# Altium PCB PCB_Switch_PowerDetect.PcbDoc
Units mm, origin at the board's own origin, x right, y up, seen from the top; angles counter-clockwise.
Board outline 30 x 30 mm, 2 copper layers (Top Layer, Bottom Layer), stack 0.579 mm thick; 36 components, 22 nets, 108 pads, 42 vias.
Unrouted connection lines stored in the file: 22.
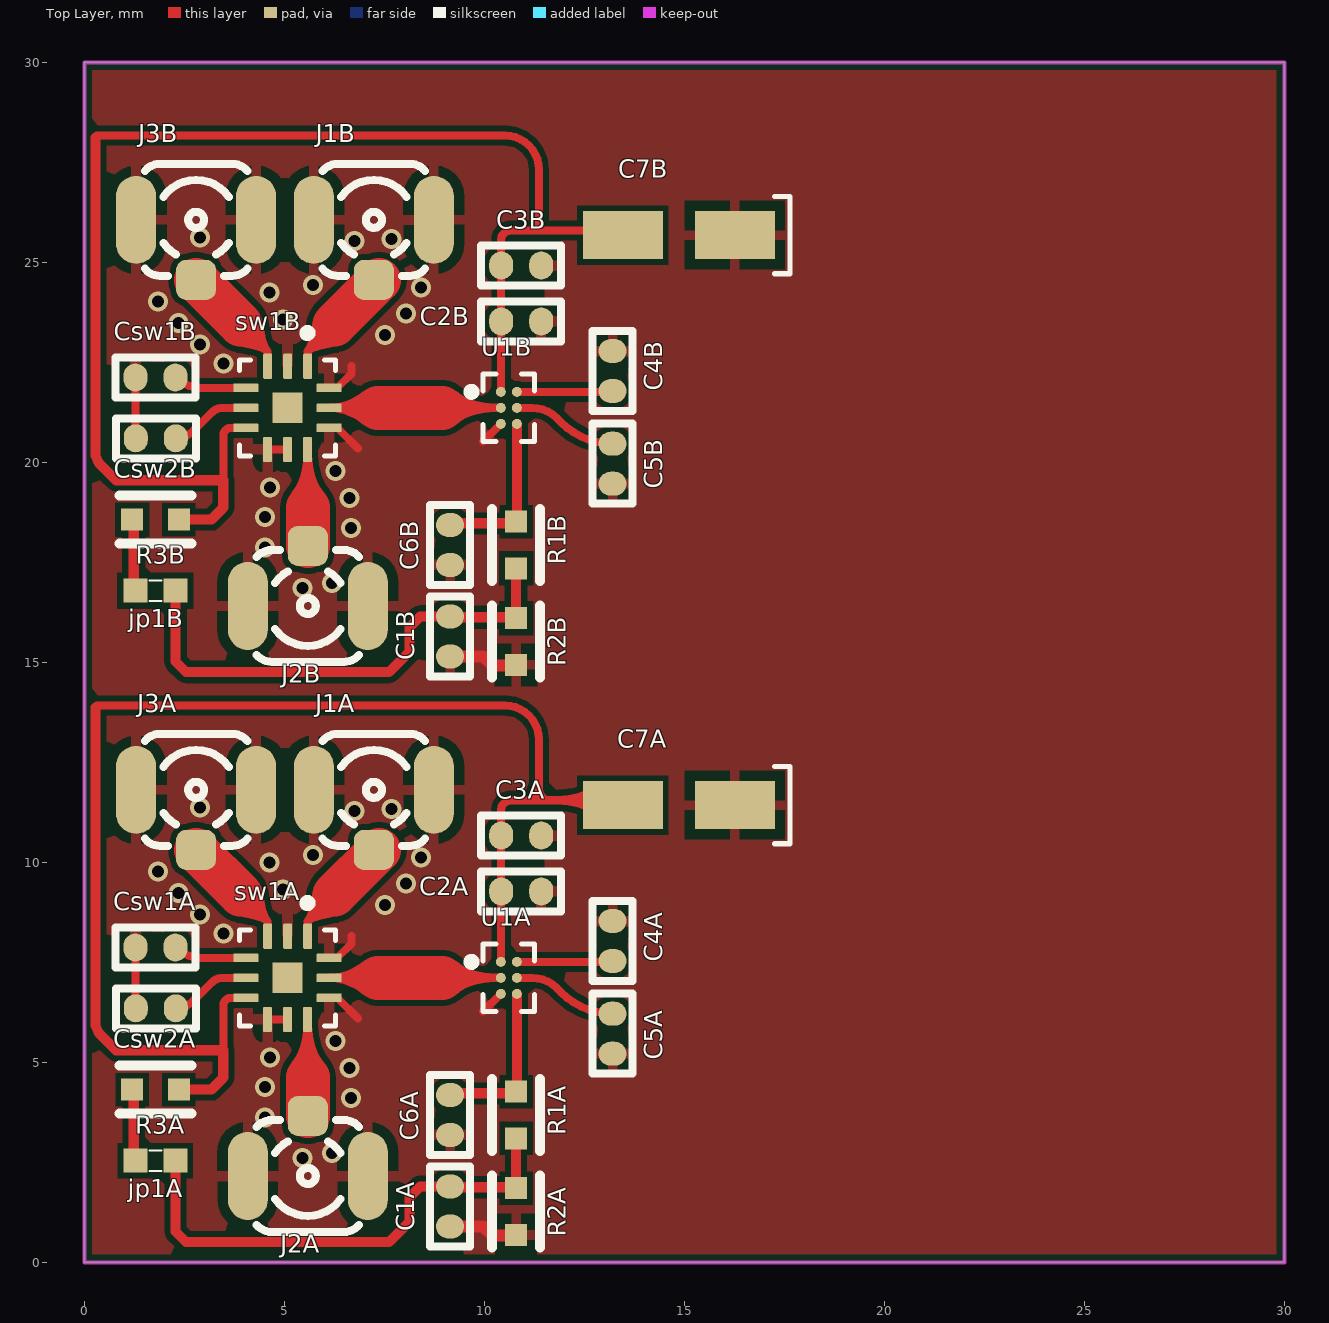
[diagram p0: Top Layer view]
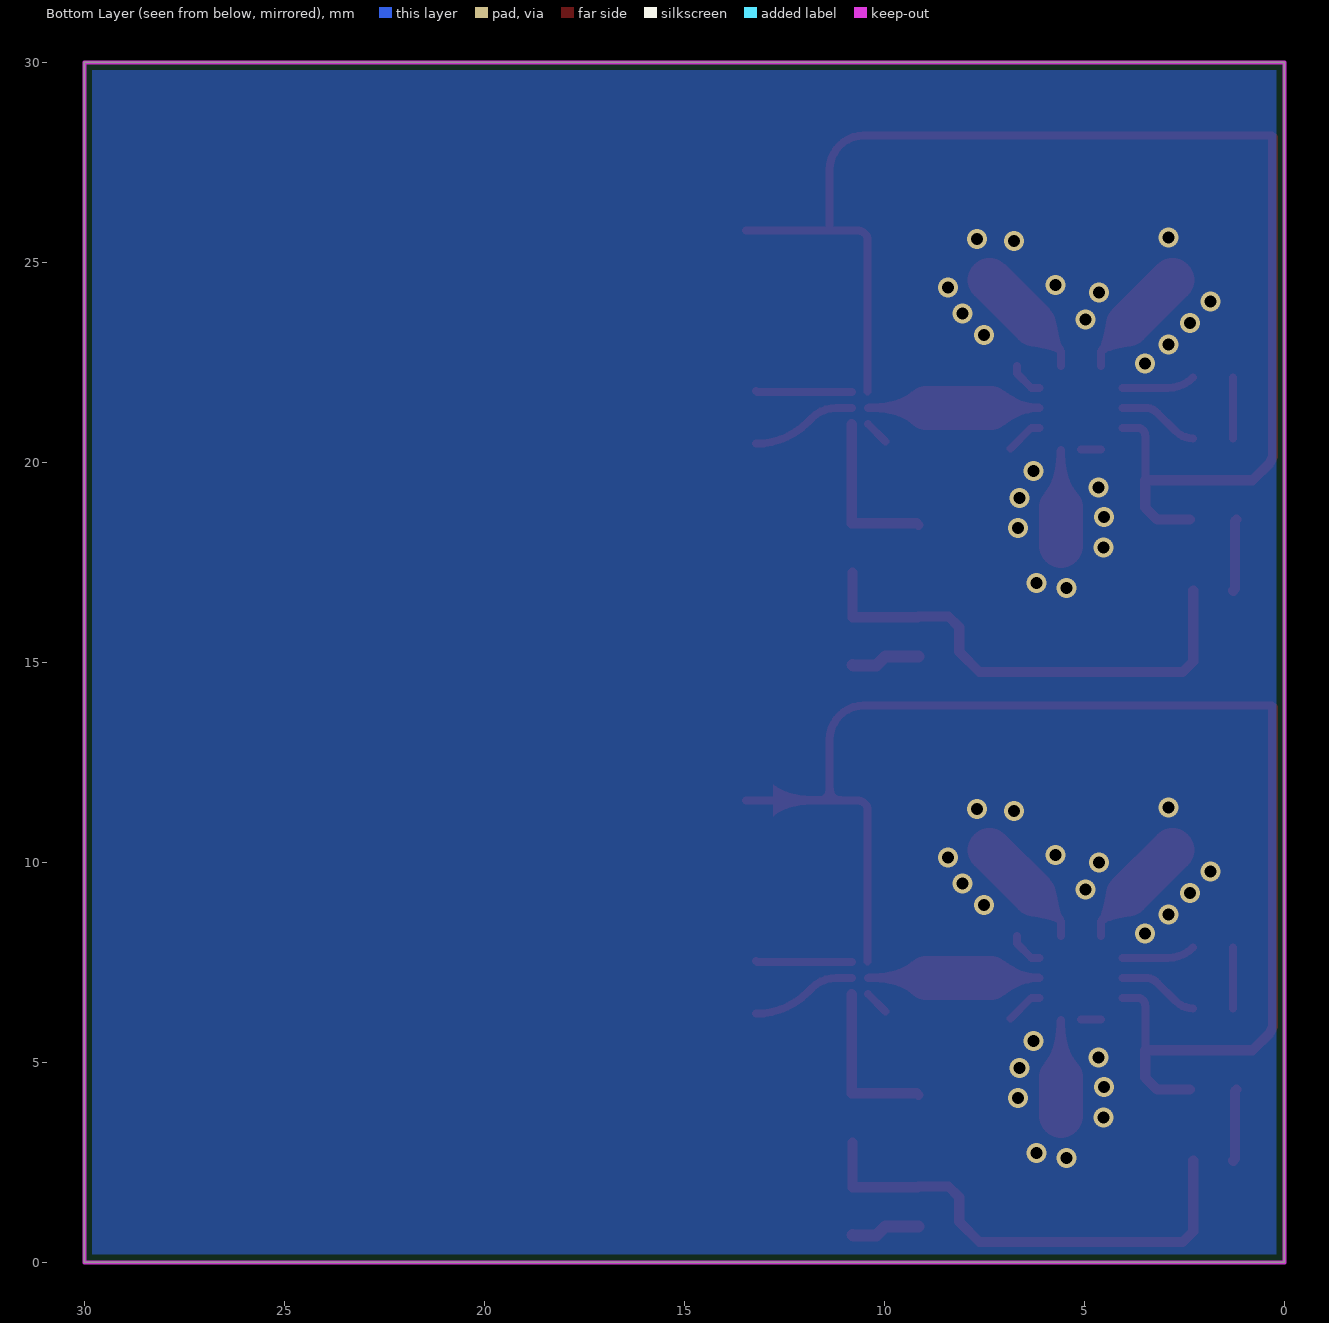
[diagram p1: Bottom Layer view, seen from below]
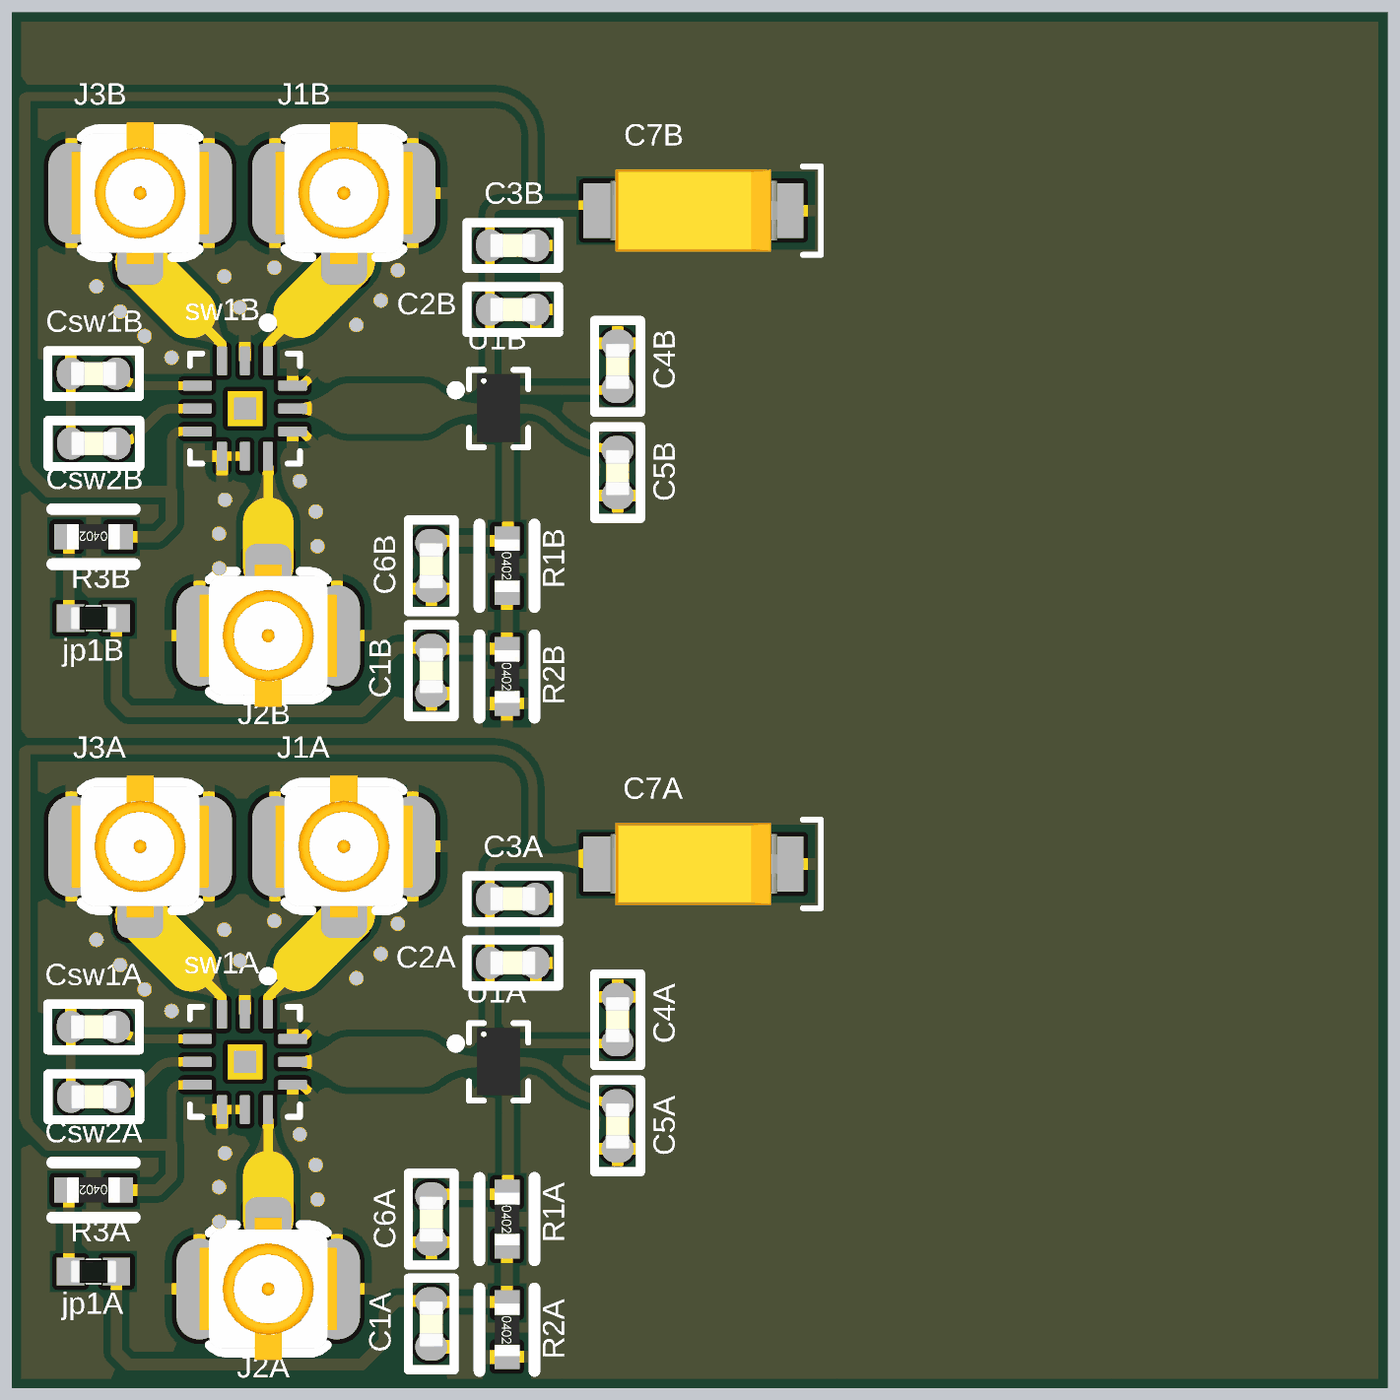
[diagram p2: 3D render of the assembled board from above, using the file's embedded part models]

## Layer stack, top to bottom
Top Solder: solder mask 0.0102, Solder Resist, Dk 3.5
Top Layer: signal copper 0.0356
Dielectric 1: prepreg 0.508, RO4350B_Equivalent, Dk 3.48
Bottom Layer: signal copper 0.0356
Bottom Solder: solder mask 0.0102, Solder Resist, Dk 3.5

## Board outline
0,0 30,0 30,30 0,30

## Design rules (kind name [scope] priority, off if disabled: settings)
Clearance Clearance_LMH2110 [InComponent('U1A')] p1: gap=0.1 ignorepadtopadclearanceinfootprint=TRUE
Clearance [All] p2: gap=0.15 ignorepadtopadclearanceinfootprint=TRUE
PolygonConnect PolygonConnect_vias [IsVia] p1: connectstyle=Direct reliefconductorwidth=0.254 reliefentries=4 polygonreliefangle="90 Angle" airgapwidth=0.254
PolygonConnect [All] p2: connectstyle=Relief reliefconductorwidth=0.254 reliefentries=4 polygonreliefangle="90 Angle" airgapwidth=0.254
RoutingVias [All] p1: holewidth=0.711 width=1.27 viastyle="Through Hole" minholewidth=0.711 minwidth=1.27 maxholewidth=0.711 maxwidth=1.27
SolderMaskExpansion [All] p1: expansion=0.102 istentingtop=FALSE
SupplyNets "Schematic Supply Nets" [InNet('GND')] p1: voltage=0.000
Width Width_RF [InNetClass('RF')] p1: maxlimit=1.1 minlimit=0.2 preferedwidth=0.254
Width [All] p2: maxlimit=0.3 minlimit=0.2 preferedwidth=0.254
30 further rules are at their usual default settings.

## Components (designator, comment, footprint, x,y, rotation, side; value= is the part's Value field where it differs from the comment)
C1A "Capacitor C SMD 0402" C0402 9.144,1.397 r90 top value=10pF
C1B "Capacitor C SMD 0402" C0402 9.144,15.647 r90 top value=10pF
C2A "Capacitor C SMD 0402" C0402 10.922,9.271 r0 top value=0.01uF
C2B "Capacitor C SMD 0402" C0402 10.922,23.521 r0 top value=0.01uF
C3A "Capacitor C SMD 0402" C0402 10.922,10.668 r0 top value=10pF
C3B "Capacitor C SMD 0402" C0402 10.922,24.918 r0 top value=10pF
C4A "Capacitor C SMD 0402" C0402 13.208,8.033 r270 top value=10pF
C4B "Capacitor C SMD 0402" C0402 13.208,22.283 r270 top value=10pF
C5A "Capacitor C SMD 0402" C0402 13.208,5.715 r90 top value=1pF
C5B "Capacitor C SMD 0402" C0402 13.208,19.965 r90 top value=1pF
C6A "Capacitor C SMD 0402" C0402 9.144,3.683 r90 top value=10pF
C6B "Capacitor C SMD 0402" C0402 9.144,17.933 r90 top value=10pF
C7A "Capacitor Tantalum SMD" "CAPP 1206 (3216X18L) Size A" 16.262,11.43 r180 top value=10uf
C7B "Capacitor Tantalum SMD" "CAPP 1206 (3216X18L) Size A" 16.262,25.68 r180 top value=10uf
Csw1A "Capacitor C SMD 0402" C0402 1.778,7.874 r0 top value=100pF
Csw1B "Capacitor C SMD 0402" C0402 1.778,22.124 r0 top value=100pF
Csw2A "Capacitor C SMD 0402" C0402 1.786,6.35 r0 top value=100pF
Csw2B "Capacitor C SMD 0402" C0402 1.786,20.6 r0 top value=100pF
J1A "UFL" UFL 7.239,11.811 r0 top
J1B "UFL" UFL 7.239,26.061 r0 top
J2A "UFL" UFL 5.588,2.159 r180 top
J2B "UFL" UFL 5.588,16.409 r180 top
J3A "UFL" UFL 2.794,11.811 r0 top
J3B "UFL" UFL 2.794,26.061 r0 top
jp1A "jumper" "RES 0402 (1005X04L)" 1.778,2.54 r0 top
jp1B "jumper" "RES 0402 (1005X04L)" 1.778,16.79 r0 top
R1A "Resistor SMD 0402" SMD-0402-RES 10.795,3.683 r180 top value=1K
R1B "Resistor SMD 0402" SMD-0402-RES 10.795,17.933 r180 top value=1K
R2A "Resistor SMD 0402" SMD-0402-RES 10.795,1.27 r180 top value=1K
R2B "Resistor SMD 0402" SMD-0402-RES 10.795,15.52 r180 top value=1K
R3A "Resistor SMD 0402" SMD-0402-RES 1.778,4.318 r90 top value=100K
R3B "Resistor SMD 0402" SMD-0402-RES 1.778,18.568 r90 top value=100K
sw1A "sky13373-460lf" QFN50P200X200X65-13N 5.08,7.112 r270 top
sw1B "sky13373-460lf" QFN50P200X200X65-13N 5.08,21.362 r270 top
U1A "LMH2110" BGA6N40P3X2_124X84X67N 10.614,7.112 r0 top
U1B "LMH2110" BGA6N40P3X2_124X84X67N 10.614,21.362 r0 top

## Footprints (in the part's own frame and the unit in brackets; to place one, negate y for a bottom-side part, rotate by r counter-clockwise, add the part's x,y. Pads: shape width x height; smd on the part's side, far side on the other; paste and mask are expansions set on the pad)
BGA6N40P3X2_124X84X67N [mm]
  round 0.25 smd: A1(-0.2,0.4) A2(0.2,0.4) B1(-0.2,0) B2(0.2,0) C1(-0.2,-0.4) C2(0.2,-0.4)
  silkscreen extent -1.03,-0.84 0.64,0.84, body extent -0.48,-0.74 0.48,0.75, height 0.51
C0402 [mm] "CHIP Capacitor, 1.0X0.5mm, 0402"
  oval 0.6x0.7 smd mask+0.075: 1(-0.5,0) 2(0.5,0)
  silkscreen extent -1,-0.5 1,0.5, body extent -0.5,-0.26 0.5,0.27, height 0.36
"CAPP 1206 (3216X18L) Size A" [mm] "Chip Capacitor, 2-Leads, Body 3.2x1.6mm, IPC High Density, chip Tantalum"
  rect 1.999x1.199 smd: 1(0,0) 2(2.8,0)
  silkscreen extent -1.38,-0.97 -0.99,0.97, body extent -0.43,-0.9 3.21,0.9, height 1.8
QFN50P200X200X65-13N [mm]
  rrect25% 0.63x0.22 smd: 1(-1.04,0.5) 3(-1.04,-0.5) 9(1.04,0.5) GND(-1.04,0) GND(1.04,0) GND(1.04,-0.5)
  rrect25% 0.22x0.63 smd: 4(-0.5,-1.04) 5(0,-1.04) 6(0.5,-1.04) 11(0,1.04) GND(-0.5,1.04) GND(0.5,1.04)
  rect 0.76x0.76 smd paste-0.14: 13(0,0)
  silkscreen extent -1.97,-1.2 1.2,1.2, body extent -1.35,-1.36 1.35,1.36, height 0.56
"RES 0402 (1005X04L)" [mm] "Chip Resistor, 2-Leads, Body 1.0x0.5mm, IPC High Density _ (0.031/0.063 W)"
  rect 0.6x0.6 smd: 1(-0.5,0) 2(0.5,0)
  silkscreen extent -0.15,-0.25 0.15,0.25, body extent -0.51,-0.25 0.51,0.25, height 0.35
SMD-0402-RES [mm]
  rect 0.55x0.55 smd: 1(0,0.584) 2(0,-0.584)
  silkscreen extent -0.6,-0.9 0.6,0.9, body extent -0.28,-0.57 0.27,0.58, height 0.41
UFL [mm] "CONN RF, COAX UP, U.FL-R-SMT-1 2.8x2.8mm"
  rrect50% 1x1 smd: 1(0,-1.5)
  oval 1x2.2 smd: 2(-1.5,0) 3(1.5,0)
  silkscreen extent -1.28,-1.4 1.28,1.4, body extent -1.5,-1.55 1.5,1.55, height 1.25

## Part data
J1A J1B J2A J2B J3A J3B: library part "RF UFL", "CONN, RF, U.FL, STRAIGHT, Ultra Miniature Coaxial", ComponentLink1Description="Our Website:", ComponentLink1URL=https://www.spaceomid.com/, Designed by=MJKhodami
sw1A sw1B: "Broadband frequency range: 0.1 to 8.0 GHz / • Low insertion loss: 0.45 dB @ 2.5 GHz, 0.65 dB @ 7.125 GHz / • High isolation: 30 dB up to 2.5 GHz / • No external DC blocking capacitors required / • Positive low voltage control: VCTL = 1.65 to 3.00 V, / VDD = 2.5 to 4.8 V / • Small, QFN (12-pin, 2 x 2 mm) package / (MSL1, 260 °C per JEDEC J-STD-020)"
U1A U1B: "- Wide Supply Range from 2.7 V to 5 V / - Logarithmic Root Mean Square Response"
C1A C1B C2A C2B C3A C3B C4A C4B C5A C5B C6A C6B C7A C7B Csw1A Csw1B Csw2A Csw2B R1A R1B R2A R2B R3A R3B: Designed by=MJKhodami

## Via types
v1: diameter 0.5, hole 0.3, Top Layer to Bottom Layer, tented both sides, 42 vias

## Nets (pads, with @x,y where several pads share a name; then routed paths per layer and width w, separated by ;. In a path a pad name is that pad's centre, name@x,y a point inside that pad or via, vN(x,y) a via of type N, cw(c..) or ccw(c..) an arc to the next point about the centre after c; other vN are vias at no path point)
GND: C1A.1 C1B.1 C2A.2 C2B.2 C3A.2 C3B.2 C4A.1 C4B.1 C5A.1 C5B.1 C6A.1 C6B.1 C7A.1 C7B.1 Csw1A.1 Csw1B.1 Csw2A.1 Csw2B.1 J1A.2 J1A.3 J1B.2 J1B.3 J2A.2 J2A.3 J2B.2 J2B.3 J3A.2 J3A.3 J3B.2 J3B.3 R2A.1 R2B.1 sw1A.GND sw1B.GND U1A.C1 U1B.C1 | length 12.5
  Top Layer w0.2: Csw1A.1 1.282,7.87 1.282,6.354 Csw2A.1 ; Csw1B.1 1.282,22.12 1.282,20.604 Csw2B.1 ; sw1A.GND@4.58,6.072 sw1A.GND@5.08,6.072 ; sw1B.GND@4.58,20.322 sw1B.GND@5.08,20.322 ; sw1A.GND@6.12,6.612 6.325,6.612 6.841,6.096 ; sw1A.GND@6.12,7.612 6.325,7.612 6.685,7.972 6.685,8.154 ; sw1B.GND@6.12,20.862 6.325,20.862 6.841,20.346 ; sw1B.GND@6.12,21.862 6.325,21.862 6.685,22.222 6.685,22.404 ; 9.969,6.267 U1A.C1 ; 9.969,20.517 U1B.C1
  Top Layer w0.3: C1A.1 9.972,0.897 10.195,0.674 10.784,0.674 R2A.1 ; C1B.1 9.972,15.147 10.195,14.924 10.784,14.924 R2B.1
  other v1: 5.449,2.602 6.191,2.734 4.52,3.627 6.663,4.111 4.513,4.38 6.625,4.864 4.643,5.123 6.274,5.532 3.48,8.223 2.891,8.694 7.511,8.936 2.358,9.227 4.967,9.32 8.044,9.469 1.841,9.776 4.63,9.995 8.414,10.126 5.721,10.186 6.754,11.285 7.681,11.333 2.894,11.376 5.449,16.852 6.191,16.984 4.52,17.877 6.663,18.361 4.513,18.631 6.625,19.114 4.643,19.373 6.274,19.782 3.48,22.473 2.891,22.944 7.511,23.186 2.358,23.477 4.967,23.57 8.044,23.719 1.841,24.026 4.63,24.245 8.414,24.377 5.721,24.436 6.754,25.535 7.681,25.583 2.894,25.626
NetC1A_2: C1A.2 jp1A.2 R1A.1 R2A.2 | length 12.5
  Top Layer w0.254: jp1A.2 2.278,0.77 2.54,0.508 7.62,0.508 8.128,1.016 8.128,1.629 8.396,1.897 C1A.2 9.165,1.876 10.795,1.876 R1A.1@10.795,2.997
NetC1B_2: C1B.2 jp1B.2 R1B.1 R2B.2 | length 12.5
  Top Layer w0.254: jp1B.2 2.278,15.02 2.54,14.758 7.62,14.758 8.128,15.266 8.128,15.879 8.396,16.147 C1B.2 9.165,16.126 10.795,16.126 R1B.1@10.795,17.247
NetC4A_2: C4A.2 U1A.A2 | length 2.4
  Top Layer w0.2: U1A.A2 13.156,7.512 ccw(c13.156,7.585) C4A.2
NetC4B_2: C4B.2 U1B.A2 | length 2.4
  Top Layer w0.2: U1B.A2 13.156,21.762 ccw(c13.156,21.835) C4B.2
NetC5A_2: C5A.2 U1A.B2 | length 2.6
  Top Layer w0.2: U1A.B2 11.198,7.112 cw(c11.198,6.245) 11.811,6.858 11.921,6.748 ccw(c13.208,8.035) C5A.2
NetC5B_2: C5B.2 U1B.B2 | length 2.6
  Top Layer w0.2: U1B.B2 11.198,21.362 cw(c11.198,20.495) 11.811,21.108 11.921,20.998 ccw(c13.208,22.285) C5B.2
NetC6A_2: C6A.2 R1A.2 U1A.C2 | length 4.2
  Top Layer w0.254: C6A.2 9.186,4.225 R1A.2@10.795,4.225 ; R1A.2@10.814,4.225 U1A.C2
NetC6B_2: C6B.2 R1B.2 U1B.C2 | length 4.2
  Top Layer w0.254: C6B.2 9.186,18.475 R1B.2@10.795,18.475 ; R1B.2@10.814,18.475 U1B.C2
NetJ1A_1: J1A.1 sw1A.1 | length 2.9
  Top Layer w0.2: sw1A.1 5.58,8.525 6.254,9.199
  Top Layer w1.1: 6.254,9.199 J1A.1@7.366,10.311
NetJ1B_1: J1B.1 sw1B.1 | length 2.9
  Top Layer w0.2: sw1B.1 5.58,22.775 6.254,23.449
  Top Layer w1.1: 6.254,23.449 J1B.1@7.366,24.561
NetJ2A_1: J2A.1 sw1A.9 | length 2.4
  Top Layer w0.2: 5.588,4.623 sw1A.9@5.588,6.064
  Top Layer w1.1: J2A.1 5.588,4.623
NetJ2B_1: J2B.1 sw1B.9 | length 2.4
  Top Layer w0.2: 5.588,18.873 sw1B.9@5.588,20.314
  Top Layer w1.1: J2B.1 5.588,18.873
NetJ3A_1: J3A.1 sw1A.3 | length 2.9
  Top Layer w0.2: 3.906,9.199 4.58,8.525 sw1A.3
  Top Layer w1.1: J3A.1 3.906,9.199
NetJ3B_1: J3B.1 sw1B.3 | length 2.9
  Top Layer w0.2: 3.906,23.449 4.58,22.775 sw1B.3
  Top Layer w1.1: J3B.1 3.906,23.449
Netjp1A_1: jp1A.1 R3A.1 | length 1.8
  Top Layer w0.254: R3A.1 1.236,4.276 1.236,2.582 jp1A.1
Netjp1B_1: jp1B.1 R3B.1 | length 1.8
  Top Layer w0.254: R3B.1 1.236,18.526 1.236,16.832 jp1B.1
RFOUT_A: sw1A.11 U1A.B1 | length 4.3
  Top Layer w0.2: sw1A.11 7.341,7.112 ; 8.941,7.112 U1A.B1
  Top Layer w1.1: 7.341,7.112 8.941,7.112
RFOUT_B: sw1B.11 U1B.B1 | length 4.3
  Top Layer w0.2: sw1B.11 7.341,21.362 ; 8.941,21.362 U1B.B1
  Top Layer w1.1: 7.341,21.362 8.941,21.362
sw_ctrl1: Csw1A.2 Csw1B.2 sw1A.4 sw1B.4 | length 3.7
  Top Layer w0.2: Csw1A.2 ccw(c2.911,8.507) 2.911,7.612 sw1A.4 ; Csw1B.2 ccw(c2.911,22.757) 2.911,21.862 sw1B.4
sw_ctrl2: Csw2A.2 Csw2B.2 sw1A.5 sw1B.5 | length 4
  Top Layer w0.2: Csw2A.2 ccw(c2.286,6.963) 2.72,6.53 3.175,6.985 cw(c3.482,6.678) 3.482,7.112 sw1A.5 ; Csw2B.2 ccw(c2.286,21.213) 2.72,20.78 3.175,21.235 cw(c3.482,20.928) 3.482,21.362 sw1B.5
VDD: C2A.1 C2B.1 C3A.1 C3B.1 C7A.2 C7B.2 R3A.2 R3B.2 sw1A.6 sw1B.6 U1A.A1 U1B.A1 | length 70.5
  Top Layer w0.2: 0.279,13.863 cw(c0.336,13.863) 0.336,13.919 10.516,13.919 cw(c10.516,13.07) 11.365,13.07 11.365,11.548 ; 0.279,28.113 cw(c0.336,28.113) 0.336,28.169 10.516,28.169 cw(c10.516,27.32) 11.365,27.32 11.365,25.798 ; 3.475,5.302 3.475,6.412 cw(c3.675,6.412) 3.675,6.612 sw1A.6 ; 3.475,19.552 3.475,20.662 cw(c3.675,20.662) 3.675,20.862 sw1B.6 ; U1A.A1@10.422,7.52 C3A.1 10.422,11.326 cw(c10.622,11.326) 10.547,11.511 10.603,11.534 cw(c10.678,11.348) 10.678,11.548 11.365,11.548 ; U1B.A1@10.422,21.77 C3B.1 10.422,25.576 cw(c10.622,25.576) 10.547,25.761 10.603,25.784 cw(c10.678,25.598) 10.678,25.798 11.365,25.798 ; C7A.2@13.462,11.548 11.365,11.548 ; C7B.2@13.462,25.798 11.365,25.798
  Top Layer w0.254: 0.279,13.863 0.279,5.922 0.354,5.742 0.794,5.302 3.475,5.302 3.475,4.618 3.175,4.318 R3A.2 ; 0.279,28.113 0.279,20.172 0.354,19.992 0.794,19.552 3.475,19.552 3.475,18.868 3.175,18.568 R3B.2
pads on no net: sw1A.13 sw1B.13

## Polygon pours and split planes (outlines as drawn)
GND on Bottom Layer "GND_L02_P001" (solid, pour order 1): 0,29.96 0.04,30 30,30 30,0 0,0
GND on Top Layer "GND_L01_P000" (solid, pour order 0): 0,29.96 0.04,30 30,30 30,0 0,0

## Keep-outs
Keep-Out Layer:
  the board outline again, w0.1

## Dimensions
0,0 to 0,30 on Mechanical 13
30,0 to 0,0 on Mechanical 13